# Altium PCB JPPCCCC.PCBDOC (part 1 of 2)
Units mm, origin at the board's own origin, x right, y up, seen from the top; angles counter-clockwise.
Board outline 108.84 x 93.85 mm, 2 copper layers (Top Layer, Bottom Layer); 131 components, 71 nets, 555 pads, 84 vias.
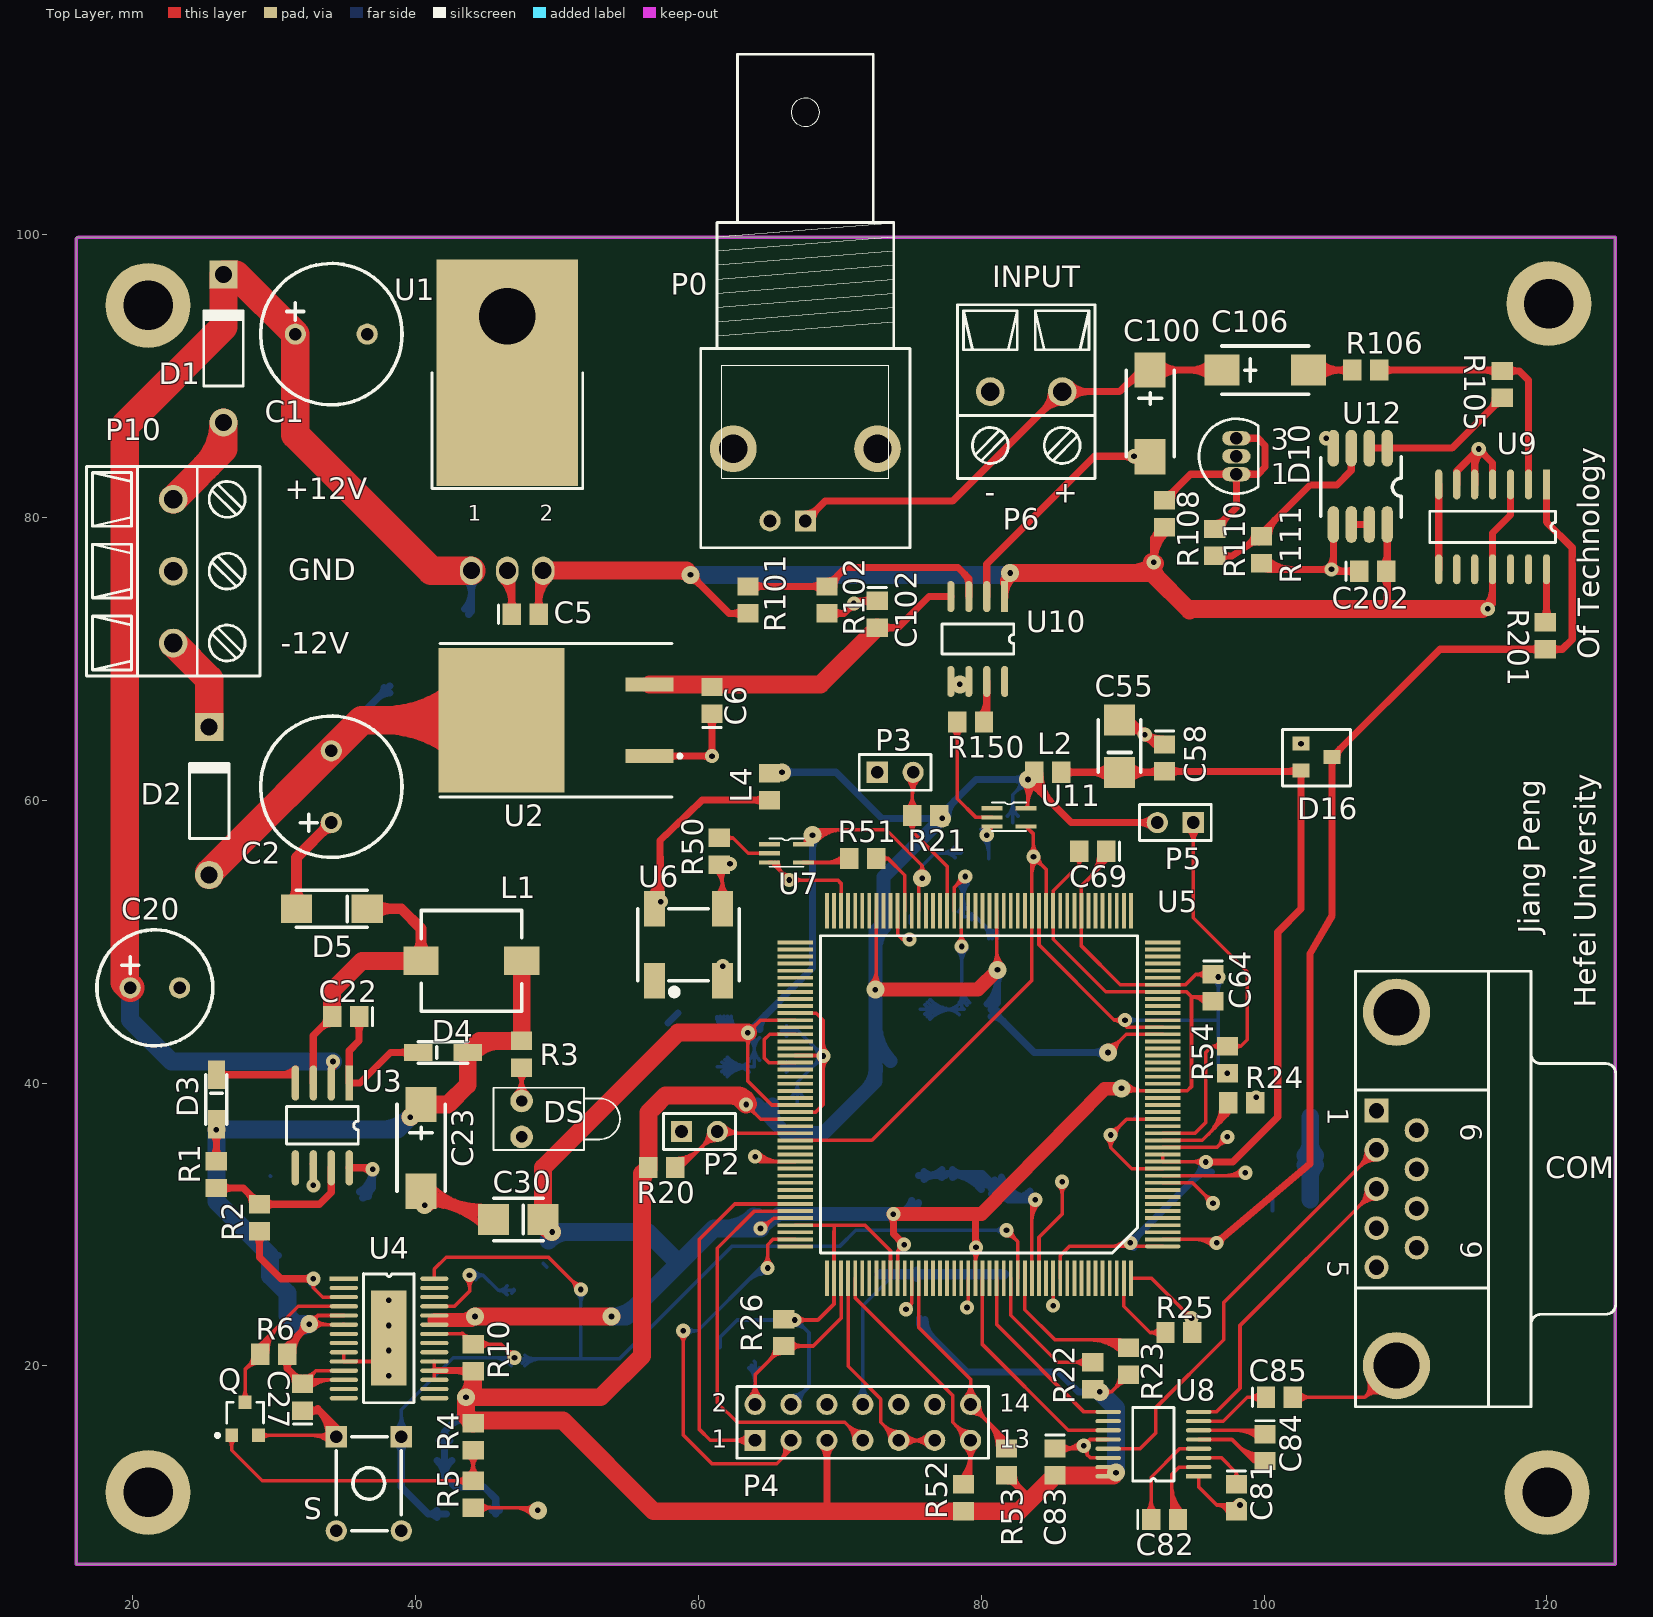
[diagram p0: Top Layer view]
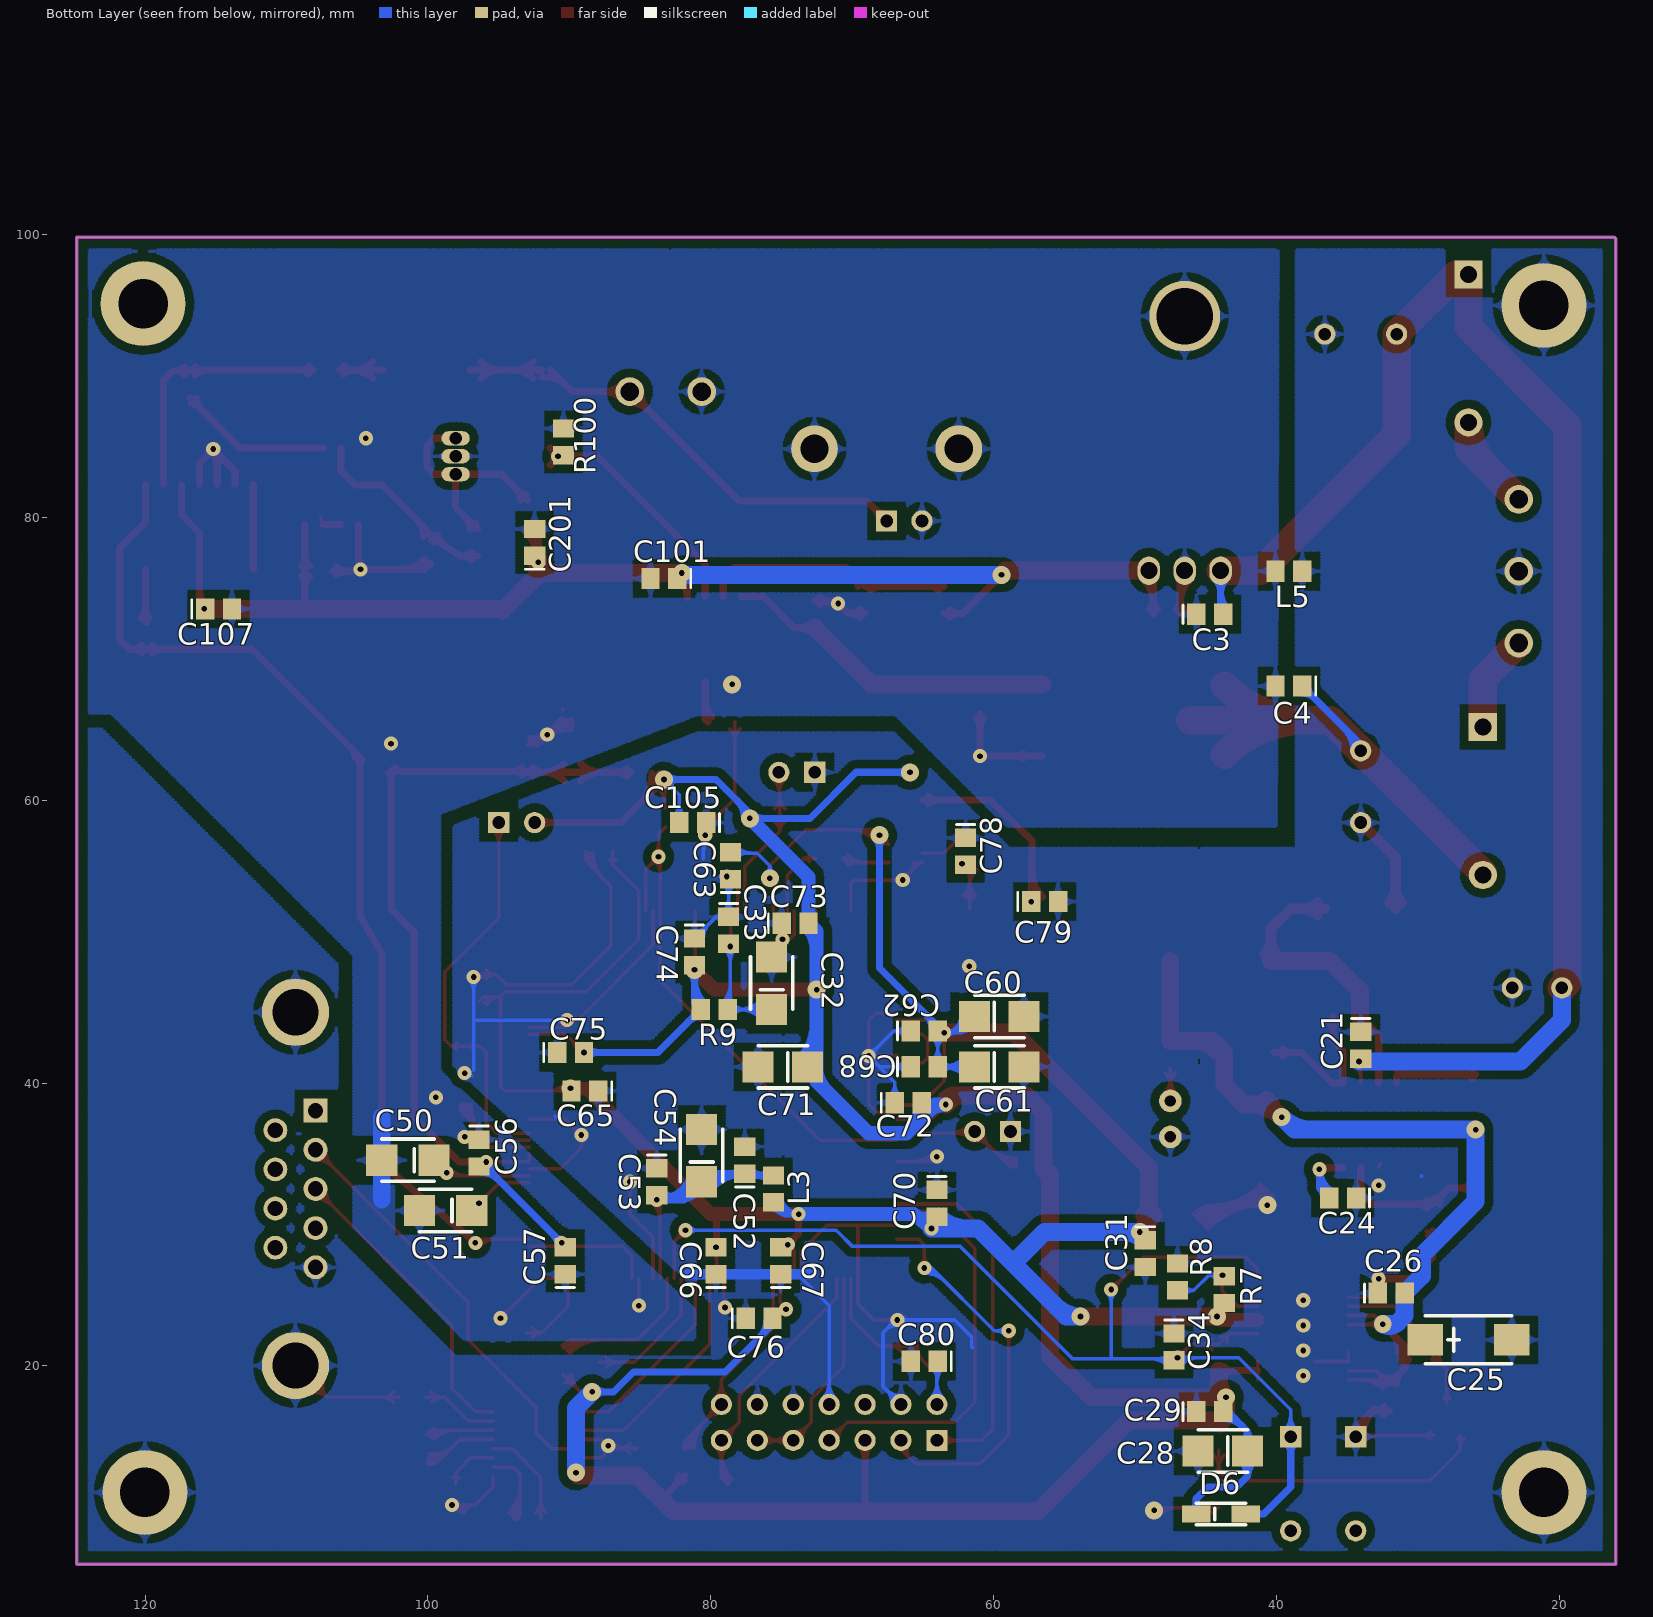
[diagram p1: Bottom Layer view, seen from below]

## Layer stack, top to bottom
Top Layer: signal copper 0.0356
Dielectric: core 0.32, FR-4, Dk 4.8
Bottom Layer: signal copper 0.0356

## Board outline
16.002,99.822 16.002,5.969 124.841,5.969 124.841,99.822

## Design rules (kind name [scope] priority, off if disabled: settings)
Clearance [All] p1: gap=0.23
ComponentClearance [All] p1: gap=0.254 collisioncheckmode=0
HoleSize [All] p1: absolutevalues=TRUE maxlimit=4 minlimit=0.025 maxpercent=80.000 minpercent=20.000
PolygonConnect [All] p1: connectstyle=Relief reliefconductorwidth=0.254 reliefentries=4 polygonreliefangle="90 Angle"
RoutingVias RoutingVias_1 [All] p1: holewidth=0.4 width=1 viastyle="Through Hole" minholewidth=0.4 minwidth=0.9 maxholewidth=0.4 maxwidth=1.27
RoutingVias [All] p2: holewidth=0.4 width=1 viastyle="Through Hole" minholewidth=0.4 minwidth=1 maxholewidth=0.4 maxwidth=1.27
ShortCircuit [All] p1 off: allowed=FALSE
SolderMaskExpansion [All] p1: expansion=0.102
TestPointUsage [All] p1: valid=0 allowmultiple=FALSE
Testpoint [All] p1: side=15 testpointundercomponent=TRUE minsize=1.016 maxsize=2.54 preferedsize=1.524 minholesize=0 maxholesize=1.016 preferedholesize=0.813 testpointgrid=0.025 style=1023 order=1234567890
Width [All] p1: maxlimit=2 minlimit=0.254 preferedwidth=0.254 bottomlayer_prefwidth=1.27 minimp=50.000000 maximp=50.000000 favimp=50.000000
15 further rules are at their usual default settings.

## Classes and differential pairs
component class Sheet1: C50 C51 C52 C53 C54 C55 C56 C57 C58 L2 L3 P2 P3 R20 R21 R22 R23 R24 R25 R26 U5
component class Sheet2: C1 C2 C3 C4 C5 C6 C20 C21 C22 C23 C24 C25 C26 C27 C28 C29 C30 C31 C32 C33 C34 D1 D2 D3 D4 D5 D6 DS L1 L5 P10 Q R1 R2 R3 R4 R5 R6 R7 R8 R9 R10 S U1 U2 U3 U4
component class Sheet3: C60 C61 C62 C63 C64 C65 C66 C67 C68 C69 C70 C71 C72 C73 C74 C75 C76 C78 C79 C80 C81 C82 C83 C84 C85 COM L4 P4 P5 R50 R51 R52 R53 R54 U6 U7 U8
component class Sheet4: C100 C101 C102 C105 C106 C107 C201 C202 D10 D16 P6 R100 R101 R102 R105 R106 R108 R110 R111 R150 R201 U9 U10 U11 U12

## Components (designator, comment, footprint, x,y, rotation, side; value= is the part's Value field where it differs from the comment)
C1 "470uF" C0915-0508 31.496,92.964 r0 top
C2 "470uF" C0915-0508 34.036,58.42 r90 top
C3 "0.1uF" CC2012-0805 44.704,73.152 r180 bottom
C4 "0.1uF" CC2012-0805 39.116,68.072 r0 bottom
C5 "0.1uF" CC2012-0805 47.752,73.152 r0 top
C6 "0.1uF" CC2012-0805 60.96,67.056 r90 top
C20 "100uF" C0915-0350 19.812,46.736 r0 top
C21 "0.1uF" CC2012-0805 34.036,42.672 r270 bottom
C22 "0.1uF" CC2012-0805 35.052,44.704 r180 top
C23 "47uF" CA2522-0612 40.386,38.481 r270 top
C24 "0.1uF" CC2012-0805 35.306,31.877 r0 bottom
C25 "47uF" CA2522-0612 29.464,21.844 r180 bottom
C26 "0.1uF" CC2012-0805 31.877,25.146 r180 bottom
C27 "0.1uF" CC2012-0805 32.004,17.78 r90 top
C28 "22uF" CA2222-0350 42.037,13.97 r0 bottom
C29 "0.1uF" CC2012-0805 44.704,16.764 r180 bottom
C30 "22uF" CA2222-0350 49.022,30.353 r180 top
C31 "0.1uF" CC2012-0805 49.276,27.94 r270 bottom
C32 "10uF" CA2222-0370 75.692,45.212 r90 bottom
C33 "0.1uF" CC2012-0805 78.74,50.8 r270 bottom
C34 "0.1uF" CC2012-0805 47.244,21.336 r270 bottom
C50 "10uF" CA2222-0370 99.568,34.544 r0 bottom
C51 "10uF" CA2222-0370 96.901,30.988 r0 bottom
C52 "0.001uF" CC2012-0805 77.597,34.544 r90 bottom
C53 "0.1uF" CC2012-0805 83.82,33.02 r270 bottom
C54 "10uF" CA2222-0370 80.645,33.02 r90 bottom
C55 "10uF" CA2222-0370 89.789,61.976 r90 top
C56 "0.1uF" CC2012-0805 96.393,35.052 r270 bottom
C57 "0.1uF" CC2012-0805 90.297,27.432 r90 bottom
C58 "0.001uF" CC2012-0805 92.964,62.992 r270 top
C60 "22uF" CA2222-0350 61.341,44.704 r180 bottom
C61 "22uF" CA2222-0350 61.341,41.148 r180 bottom
C62 "0.1uF" CC2012-0805 64.897,43.688 r180 bottom
C63 "0.1uF" CC2012-0805 78.613,55.372 r90 bottom
C64 "0.1uF" CC2012-0805 96.393,46.736 r270 top
C65 "0.1uF" CC2012-0805 88.9,39.448 r0 bottom
C66 "0.1uF" CC2012-0805 79.629,27.432 r90 bottom
C67 "0.1uF" CC2012-0805 75.057,27.432 r90 bottom
C68 "0.1uF" CC2012-0805 64.897,41.148 r180 bottom
C69 "0.1uF" CC2012-0805 87.884,56.388 r180 top
C70 "0.1uF" CC2012-0805 64.008,31.496 r270 bottom
C71 "22uF" CA2222-0350 73.152,41.148 r0 bottom
C72 "0.1uF" CC2012-0805 66.04,38.608 r180 bottom
C73 "0.1uF" CC2012-0805 74.041,51.308 r180 bottom
C74 "0.1uF" CC2012-0805 81.153,49.276 r270 bottom
C75 "0.1uF" CC2012-0805 89.916,42.164 r180 bottom
C76 "0.1uF" CC2012-0805 76.581,23.368 r180 bottom
C78 "33pF" CC2012-0805 61.976,56.388 r270 bottom
C79 "0.1uF" CC2012-0805 56.388,52.832 r180 bottom
C80 "0.1uF" CC2012-0805 64.897,20.32 r0 bottom
C81 "0.1uF" CC2012-0805 98.044,10.668 r270 top
C82 "0.1uF" CC2012-0805 92.964,9.144 r0 top
C83 "0.1uF" CC2012-0805 85.217,13.208 r270 top
C84 "0.1uF" CC2012-0805 100.076,14.224 r270 top
C85 "0.1uF" CC2012-0805 101.092,17.78 r0 top
C100 "47uF" CA2522-0612 91.948,90.424 r270 top
C101 "0.1uF" CC2012-0805 83.312,75.692 r0 bottom
C102 "0.1uF" CC2012-0805 72.644,73.152 r270 top
C105 "0.1uF" CC2012-0805 81.28,58.42 r0 bottom
C106 "47uF" CA2522-0612 97.028,90.424 r0 top
C107 "0.1uF" CC2012-0805 114.808,73.533 r180 bottom
C201 "0.1uF" CC2012-0805 92.456,78.232 r90 bottom
C202 "0.1uF" CC2012-0805 107.696,76.2 r0 top
COM "D Connector 9" DSUB1.385-2H9 118.872,32.512 r270 top
D1 "1N4007" DO-41 26.416,91.948 r90 top
D2 "1N4007" DO-41 25.4,59.944 r90 top
D3 "1N4148" D2012-0350 25.908,37.084 r90 top
D4 "1N4148" D2012-0350 43.688,42.164 r180 top
D5 "SS16" D2220-0500 36.576,52.324 r0 top
D6 "1N4148" D2012-0350 42.164,9.525 r0 bottom
D10 "TL431" BCY-W3 98.044,84.328 r0 top
D16 "BAT54S" SOT23 102.616,64.008 r270 top
DS "LED1" LED-1 47.498,37.465 r0 top
L1 "47uH" L2025-0712 40.386,48.641 r0 top
L2 "BLM21P221SN" CR2012-0805 84.709,61.976 r180 top
L3 "BLM21P221SN" CR2012-0805 75.565,32.512 r270 bottom
L4 "BLM21P221SN" CR2012-0805 65.024,60.96 r90 top
L5 "BLM21P221SN" CR2012-0805 39.116,76.2 r0 bottom
P0 "Comment" "BNC_RA CON" 67.564,79.756 r270 top
P2 "Header 2" HDR1X2 58.801,36.576 r0 top
P3 "Header 2" HDR1X2 72.644,61.976 r0 top
P4 "Header 7X2" HDR2X7 64.008,14.732 r0 top
P5 "Header 2" HDR1X2 94.996,58.42 r180 top
P6 "Header 2" 5.08_A 80.645,88.9 r0 top
P10 "Header 3" 5.08x3_A 22.86,71.12 r90 top
Q "BSS138" SO-G3/Z3.3 27.94,16.256 r0 top
R1 "220" CR2012-0805 25.908,33.528 r90 top
R2 "100" CR2012-0805 28.956,30.48 r90 top
R3 "1.1K" CR2012-0805 47.498,42.037 r90 top
R4 "1.5K" CR2012-0805 44.069,14.986 r90 top
R5 "2.0K" CR2012-0805 44.069,10.922 r90 top
R6 "10K" CR2012-0805 29.972,20.828 r0 top
R7 "16.9K" CR2012-0805 43.688,25.4 r270 bottom
R8 "30.1K" CR2012-0805 46.99,26.289 r90 bottom
R9 "0" CR2012-0805 79.756,45.212 r180 bottom
R10 "10K" CR2012-0805 44.069,20.574 r90 top
R20 "10K" CR2012-0805 57.404,34.036 r180 top
R21 "10k" CR2012-0805 76.073,58.928 r0 top
R22 "10K" CR2012-0805 87.884,19.304 r270 top
R23 "10K" CR2012-0805 90.424,20.32 r270 top
R24 "24.9K" CR2012-0805 98.425,38.608 r0 top
R25 "2.2K" CR2012-0805 93.98,22.352 r0 top
R26 "2.2K" CR2012-0805 66.04,22.352 r90 top
R50 "100" CR2012-0805 61.468,56.388 r90 top
R51 "100" CR2012-0805 71.628,55.88 r0 top
R52 "4.7K" CR2012-0805 78.74,10.668 r270 top
R53 "4.7K" CR2012-0805 81.788,13.208 r90 top
R54 "10K" CR2012-0805 97.409,41.656 r90 top
R100 "33K" CR2012-0805 90.424,85.344 r90 bottom
R101 "21K" CR2012-0805 63.5,74.168 r270 top
R102 "750" CR2012-0805 69.088,74.168 r90 top
R105 "2K" CR2012-0805 116.84,89.408 r90 top
R106 "2K" CR2012-0805 107.188,90.424 r0 top
R108 "1K" CR2012-0805 92.964,80.264 r270 top
R110 "1.1K" CR2012-0805 96.52,78.232 r90 top
R111 "1.5K" CR2012-0805 99.822,77.724 r90 top
R150 "100" CR2012-0805 79.248,65.532 r180 top
R201 "200" CR2012-0805 119.888,71.628 r270 top
S "Reset Button" SW0915-4666 38.989,14.986 r180 top
U1 "L7805CV" TO-220-H 1299.464,1343.787 r0 top
U2 "L7905CD2T" TO-263 51.308,65.659 r90 top
U3 "CS51414EDR8" AD8021ARZ-1 35.306,40.005 r270 top
U4 "TPS767D301" TPS767D301 34.925,26.162 r0 top
U5 "TMS320F2812" TMS320F2812PGFA 92.837,28.448 r180 top
U6 "30MHZ" CR1525-4850 56.896,47.244 r0 top
U7 "SN74LVC1G14" SC-70 65.024,56.896 r270 top
U8 "MAX3221E" PW16 95.377,12.192 r180 top
U9 "OPA2690I-14D" SOP14 119.976,82.335 r270 top
U10 "Comment" SOP8 81.661,74.403 r270 top
U11 "SN74LVC1G14" SC-70 80.772,59.436 r270 top
U12 "LM358" SO-8 108.712,84.902 r270 top

## Footprints (in the part's own frame and the unit in brackets; to place one, negate y for a bottom-side part, rotate by r counter-clockwise, add the part's x,y. Pads: shape width x height; smd on the part's side, far side on the other; paste and mask are expansions set on the pad)
5.08_A [mil]
  round 80 hole 52: 1(0,0) 2(200,0)
  silkscreen extent -92,-242 292,242
5.08x3_A [mil]
  round 80 hole 52: 1(0,0) 2(200,0) 3(400,0)
  silkscreen extent -92,-242 492,242
AD8021ARZ-1 [mm]
  rect 2.5x0.52 smd: 1(0,0)
  oval 2.5x0.52 smd: 2(0,-1.27) 3(0,-2.54) 4(0,-3.81) 5(6,-3.81) 6(6,-2.54) 7(6,-1.27) 8(6,0)
  silkscreen extent 1.65,-4.44 4.32,0.64
BCY-W3 [mm] "TO, Flat Index; 3 In-Line, Axial Leads; Body Dia. 4.8mm; Leads 0.55 x 0.51 mm (max)"
  oval 2x1 hole 0.9: 1(0,-1.27) 2(0,0) 3(0,1.27)
  silkscreen extent -2.65,-2.65 1.55,2.65
"BNC_RA CON" [mm] "Connector; BNC Elbow"
  rect 1.5x1.5 hole 0.9: 1(0,0)
  round 3.3 hole 2: 2(-5.1,5.1) 2(-5.1,-5.1)
  round 1.5 hole 0.9: 2(0,-2.5)
  silkscreen extent -33,-7.4 1.9,7.4
C0915-0350 [mm] "内径0.9mm，外径1.5mm，间距3.5mm"
  round 1.5 hole 0.9: 1(0,0) 2(3.5,0)
  silkscreen extent -2.35,-4.1 5.85,4.1
C0915-0508 [mm] "内径0.9mm，外径1.5mm，间距5.08mm"
  round 1.5 hole 0.9: 1(0,0) 2(5.08,0)
  silkscreen extent -2.46,-5 7.54,5
CA2222-0350 [mm] "焊盘2.2*2.2mm，间距3.50mm"
  rect 2.2x2.2 smd: 1(0,0) 2(3.5,0)
  silkscreen extent 0,-1.5 3.5,1.5
CA2222-0370 [mm] "焊盘2.2*2.2mm，间距3.70mm"
  rect 2.2x2.2 smd: 1(0,0) 2(3.7,0)
  silkscreen extent 0,-1.5 3.7,1.5
CA2522-0612 [mm] "焊盘2.5*2.2mm，间距6.12mm"
  rect 2.5x2.2 smd: 1(0,0) 2(6.12,0)
  silkscreen extent 0,-1.7 6.12,1.7
CC2012-0805 [mm] "Chip Capacitor; Body 2.0 x 1.2 mm (LxW typ)"
  rect 1.3x1.5 smd: 1(-0.95,0) 2(0.95,0)
  silkscreen extent -1.9,-0.65 -1.9,0.65
CR1525-4850 [mm] "焊盘：1.5*2.5mm，间距：4.8*5.08mm"
  rect 1.5x2.5 smd: 1(0,0) 4(4.8,0) 5(4.8,5.08) 8(0,5.08)
  silkscreen extent -1.2,-1 6,5.08
CR2012-0805 [mm] "Chip Resistor; Body 2.0 x 1.3 mm (LxW typ)"
  rect 1.3x1.5 smd: 1(-0.95,0) 2(0.95,0)
D2012-0350 [mm] "焊盘2.0*1.2mm，间距3.50mm"
  rect 2x1.2 smd: 1(0,0) 2(3.5,0)
  silkscreen extent 0,-0.75 3.5,0.75
D2220-0500 [mm] "焊盘2.2*2.0mm，间距5.00mm"
  rect 2.2x2 smd: 1(-5,0) 2(0,0)
  silkscreen extent -5,-1.3 0,1.3
DO-41 [mm] "Diode, Axial; Body 5.2 x 2.7 mm (LxDia. max), Lead Dia. 0.86 mm (max)"
  round 2 hole 1.2: 1(-5.23,0)
  rect 2x2 hole 1.2: 2(5.23,0)
  silkscreen extent -2.65,-1.41 2.75,1.4
DSUB1.385-2H9 [mm] "Connector; D Subminiature; 9 Position; Right Angle; Pitch 1.385 mm"
  rect 1.69x1.69 hole 1.09: 1(-5.54,-10.92)
  round 1.69 hole 1.09: 2(-2.77,-10.92) 3(0,-10.92) 4(2.77,-10.92) 5(5.54,-10.92) 6(-4.155,-8.08) 7(-1.385,-8.08) 8(1.385,-8.08) 9(4.155,-8.08)
  round 4.76 hole 3.26: 10(-12.495,-9.5) 11(12.495,-9.5)
  silkscreen extent -15.4,-12.4 15.4,6
HDR1X2 [mm] "Connector; Header; 2 Position"
  rect 1.5x1.5 hole 0.9: 1(0,0)
  round 1.5 hole 0.9: 2(2.54,0)
  silkscreen extent -1.27,-1.27 3.81,1.27
HDR2X7 [mm] "Connector; Header; 7x2 Position"
  rect 1.5x1.5 hole 0.9: 1(0,0)
  round 1.5 hole 0.9: 2(0,2.54) 3(2.54,0) 4(2.54,2.54) 5(5.08,0) 6(5.08,2.54) 7(7.62,0) 8(7.62,2.54) 9(10.16,0) 10(10.16,2.54) 11(12.7,0) 12(12.7,2.54) 13(15.24,0) 14(15.24,2.54)
  silkscreen extent -1.27,-1.27 16.51,3.81
L2025-0712 [mm] "2*2.5mm---7.12mm"
  rect 2.5x2 smd: 1(0,0) 2(7.12,0)
  silkscreen extent 0,-3.56 7.12,3.56
LED-1 [mm] "Typical RED GaAs LED; 2 Leads"
  round 1.6 hole 0.8: 1(0,1.27) 2(0,-1.27)
  silkscreen extent -2,-2.2 6.95,2.2
PW16 [mm] "焊盘0.30*1.80mm，间距0.65mm，列距6.40mm"
  rect 1.8x0.3 smd: 1(0,0)
  oval 1.8x0.3 smd: 2(0,-0.65) 3(0,-1.3) 4(0,-1.95) 5(0,-2.6) 6(0,-3.25) 7(0,-3.9) 8(0,-4.55) 9(6.4,-4.55) 10(6.4,-3.9) 11(6.4,-3.25) 12(6.4,-2.6) 13(6.4,-1.95) 14(6.4,-1.3) 15(6.4,-0.65) 16(6.4,0)
  silkscreen extent 1.73,-4.88 4.67,0.33
SC-70 [mm] "焊盘：0.3*1.5mm，间距0.65mm，2.40mm"
  rect 0.3x1.5 smd: 1(0,0) 2(0.65,0) 3(1.3,0) 4(1.3,2.4) 5(0,2.4)
  silkscreen extent -0.4,0 1.6,2.4
SO-8 [mm]
  oval 2.6x0.8 smd: 1(0,0) 2(0,-1.27) 3(0,-2.54) 4(0,-3.81) 5(5.4,-3.81) 6(5.4,-2.54) 7(5.4,-1.27) 8(5.4,0)
  silkscreen extent 0.6,-4.7 4.9,1
SO-G3/Z3.3 [mm] "SOT-23; 3 Leads; Body 3.0 x 2.5 mm, inc. leads (LxW max)"
  rect 0.9x0.95 smd: 1(-0.95,-1.175) 2(0.95,-1.175) 3(0,1.175)
  silkscreen extent -2.07,-1.3 1.3,1.18
SOP8 [mm]
  rect 2.2x0.5 smd: 1(0,0)
  oval 2.2x0.5 smd: 2(0,-1.27) 3(0,-2.54) 4(0,-3.81) 5(6,-3.81) 6(6,-2.54) 7(6,-1.27) 8(6,0)
  silkscreen extent 1.93,-4.44 4.07,0.64
SOP14 [mm]
  rect 2.12x0.508 smd: 1(0,0)
  oval 2.12x0.508 smd: 2(0,-1.27) 3(0,-2.54) 4(0,-3.81) 5(0,-5.08) 6(0,-6.35) 7(0,-7.62) 8(6,-7.62) 9(6,-6.35) 10(6,-5.08) 11(6,-3.81) 12(6,-2.54) 13(6,-1.27) 14(6,0)
  silkscreen extent 1.89,-8.25 4.1,0.64
SOT23 [mm]
  rect 1x1.2 smd: 1(0,0) 2(1.9,0) 3(0.95,2.2)
  silkscreen extent -1,-1.3 3,3.5
SW0915-4666 [mm] "焊盘：内径0.9mm，外径1.5mm，水平间距4.60mm，垂直间距6.65mm"
  rect 1.5x1.5 hole 0.9: 1(0,0) 2(4.6,0)
  round 1.5 hole 0.9: 3(4.6,6.65) 4(0,6.65)
  silkscreen extent 0,0 4.6,6.65
TMS320F2812PGFA [mm]
  oval 2.5x0.27 smd: 1(0,0)
  rect 2.5x0.27 smd: 2(0,-0.5) 3(0,-1) 4(0,-1.5) 5(0,-2) 6(0,-2.5) 7(0,-3) 8(0,-3.5) 9(0,-4) 10(0,-4.5) 11(0,-5) 12(0,-5.5) 13(0,-6) 14(0,-6.5) 15(0,-7) 16(0,-7.5) 17(0,-8) 18(0,-8.5) 19(0,-9) 20(0,-9.5) 21(0,-10) 22(0,-10.5) 23(0,-11) 24(0,-11.5) 25(0,-12) 26(0,-12.5) 27(0,-13) 28(0,-13.5) 29(0,-14) 30(0,-14.5) 31(0,-15) 32(0,-15.5) 33(0,-16) 34(0,-16.5) 35(0,-17) 36(0,-17.5) 37(0,-18) 38(0,-18.5) 39(0,-19) 40(0,-19.5) 41(0,-20) 42(0,-20.5) 43(0,-21) 44(0,-21.5) 89(26,-21.5) 90(26,-21) 91(26,-20.5) 92(26,-20) 93(26,-19.5) 94(26,-19) 95(26,-18.5) 96(26,-18) 97(26,-17.5) 98(26,-17) 99(26,-16.5) 100(26,-16) 101(26,-15.5) 102(26,-15) 103(26,-14.5) 104(26,-14) 105(26,-13.5) 106(26,-13) 107(26,-12.5) 108(26,-12) 109(26,-11.5) 110(26,-11) 111(26,-10.5) 112(26,-10) 113(26,-9.5) 114(26,-9) 115(26,-8.5) 116(26,-8) 117(26,-7.5) 118(26,-7) 119(26,-6.5) 120(26,-6) 121(26,-5.5) 122(26,-5) 123(26,-4.5) 124(26,-4) 125(26,-3.5) 126(26,-3) 127(26,-2.5) 128(26,-2) 129(26,-1.5) 130(26,-1) 131(26,-0.5) 132(26,0)
  rect 0.27x2.5 smd: 45(2.25,-23.75) 46(2.75,-23.75) 47(3.25,-23.75) 48(3.75,-23.75) 49(4.25,-23.75) 50(4.75,-23.75) 51(5.25,-23.75) 52(5.75,-23.75) 53(6.25,-23.75) 54(6.75,-23.75) 55(7.25,-23.75) 56(7.75,-23.75) 57(8.25,-23.75) 58(8.75,-23.75) 59(9.25,-23.75) 60(9.75,-23.75) 61(10.25,-23.75) 62(10.75,-23.75) 63(11.25,-23.75) 64(11.75,-23.75) 65(12.25,-23.75) 66(12.75,-23.75) 67(13.25,-23.75) 68(13.75,-23.75) 69(14.25,-23.75) 70(14.75,-23.75) 71(15.25,-23.75) 72(15.75,-23.75) 73(16.25,-23.75) 74(16.75,-23.75) 75(17.25,-23.75) 76(17.75,-23.75) 77(18.25,-23.75) 78(18.75,-23.75) 79(19.25,-23.75) 80(19.75,-23.75) 81(20.25,-23.75) 82(20.75,-23.75) 83(21.25,-23.75) 84(21.75,-23.75) 85(22.25,-23.75) 86(22.75,-23.75) 87(23.25,-23.75) 88(23.75,-23.75) 133(23.75,2.25) 134(23.25,2.25) 135(22.75,2.25) 136(22.25,2.25) 137(21.75,2.25) 138(21.25,2.25) 139(20.75,2.25) 140(20.25,2.25) 141(19.75,2.25) 142(19.25,2.25) 143(18.75,2.25) 144(18.25,2.25) 145(17.75,2.25) 146(17.25,2.25) 147(16.75,2.25) 148(16.25,2.25) 149(15.75,2.25) 150(15.25,2.25) 151(14.75,2.25) 152(14.25,2.25) 153(13.75,2.25) 154(13.25,2.25) 155(12.75,2.25) 156(12.25,2.25) 157(11.75,2.25) 158(11.25,2.25) 159(10.75,2.25) 160(10.25,2.25) 161(9.75,2.25) 162(9.25,2.25) 163(8.75,2.25) 164(8.25,2.25) 165(7.75,2.25) 166(7.25,2.25) 167(6.75,2.25) 168(6.25,2.25) 169(5.75,2.25) 170(5.25,2.25) 171(4.75,2.25) 172(4.25,2.25) 173(3.75,2.25) 174(3.25,2.25) 175(2.75,2.25) 176(2.25,2.25)
  silkscreen extent 1.79,-21.96 24.21,0.47
TO-220-H [mm]
  oval 1.6x2 hole 1.2: 1(-1255.522,-1267.553) 2(-1250.442,-1267.553) 3(-1252.982,-1267.553)
  rect 10x16 smd: 3(-1252.982,-1253.553)
  round 5 hole 4: 3(-1252.982,-1249.553)
  silkscreen extent -1258.32,-1261.74 -1247.65,-1253.55
TO-263 [mm] "D2-PAK/TO-263-AB; 3 Leads (1 Cropped); Body 15.9 (inc. leads) x 10.4 mm (LxW max)"
  rect 1x3.4 smd: 1(-2.54,-5.225) 3(2.54,-5.225)
  rect 10.25x8.9 smd: 4(0,5.225)
  silkscreen extent -5.43,-7.5 5.43,9.57
TPS767D301 [mm]
  rect 2x0.3 smd: 1(0,0)
  oval 2x0.3 smd: 2(0,-0.65) 3(0,-1.3) 4(0,-1.95) 5(0,-2.6) 6(0,-3.25) 7(0,-3.9) 8(0,-4.55) 9(0,-5.2) 10(0,-5.85) 11(0,-6.5) 12(0,-7.15) 13(0,-7.8) 14(0,-8.45) 15(6.4,-8.45) 16(6.4,-7.8) 17(6.4,-7.15) 18(6.4,-6.5) 19(6.4,-5.85) 20(6.4,-5.2) 21(6.4,-4.55) 22(6.4,-3.9) 23(6.4,-3.25) 24(6.4,-2.6) 25(6.4,-1.95) 26(6.4,-1.3) 27(6.4,-0.65) 28(6.4,0)
  silkscreen extent 1.4,-8.78 4.95,0.38

## Part data
C1 C2: library part "Cap Pol2", "Polarized Capacitor (Axial)"
C3 C4 C5 C6 C62 C63 C64 C65 C66 C67 C68 C69 C70 C72 C73 C74 C75 C79 C81 C82 C83 C84 C85 C201 C202: library part "Cap Semi", "Capacitor (Semiconductor SIM Model)"
C20 C23 C25 C28 C30: library part "Cap Pol1", "Polarized Capacitor (Radial)"
C21 C22 C24 C26 C27 C29 C31 C33 C34 C50 C51 C52 C53 C56 C57 C58 C76 C78 C80 C101 C102 C105 C107: library part Cap, "Capacitor"
C32 C54 C55 C60 C61 C71 C100 C106: library part "Cap Pol3", "Polarized Capacitor (Surface Mount)"
COM: "Receptacle Assembly, 9 Position, Right Angle"
D1 D2: "1.0 Ampere General Purpose Rectifier"
D3 D4 D6: library part "Diode 1N4148", "High Conductance Fast Diode"
D5: library part Diode, "Default Diode"
D16: "Schottky Barrier Double Diode"
DS: "Typical RED GaAs LED"
L1: library part Inductor, "Inductor"
L2 L3 L4 L5: library part "Inductor Iron", "Magnetic-Core Inductor"
P2 P3: library part "Header 2H", "Header, 2-Pin, Right Angle"
P4: "Header, 7-Pin, Dual row"
P5 P6: "Header, 2-Pin"
P10: "Header, 3-Pin"
R1 R2 R3 R4 R5 R6 R7 R8 R9 R10 R50 R51 R108 R111: library part Res1, "Resistor"
R20 R21 R22 R23 R24 R25 R26 R52 R53 R54 R100 R101 R102 R105 R106 R150: library part Res2, "Resistor"
R110: library part "Res Adj1", "Variable Resistor"
R201: library part Res3, "Resistor"
U1: "Positive Voltage Regulator"
U2: library part L7905CV, "Negative Voltage Regulator"
U3: library part CS51414
U5: library part TMS320F2812PGF
U6: library part Crystal, "有源晶振"
U9 U12: library part LF353

## Free pads (board coordinates)
  rect 2.5x6.7 smd: 0(38.1,21.971)
  round 2.032 hole 1.321: 1(22.86,71.12) 2(22.86,76.2) 3(22.86,81.28)
  round 6 hole 3.5: ""(21.082,11.049) ""(21.082,94.996) ""(120.015,11.049) ""(120.142,95.123)

## Via types
v1: diameter 1, hole 0.4, Top Layer to Bottom Layer, 61 vias
v2: diameter 1.27, hole 0.4, Top Layer to Bottom Layer, 23 vias

## Nets (pads, with @x,y where several pads share a name; then routed paths per layer and width w, separated by ;. In a path a pad name is that pad's centre, name@x,y a point inside that pad or via, vN(x,y) a via of type N, cw(c..) or ccw(c..) an arc to the next point about the centre after c; other vN are vias at no path point)
1.8V: C30.1 C31.1 C60.1 C61.1 C62.2 C63.2 C64.2 C65.2 C66.2 C67.2 C68.2 C69.2 C70.2 L3.2 R7.2 U4.23 U4.24 U5.23 U5.37 U5.56 U5.75 U5.100 U5.112 U5.128 U5.143 U5.154 U7.5 | length 267.5
  Top Layer w0.254: U4.23@41.325,22.912 U4.24@41.325,23.562 ; C30.1@49.022,29.852 C30.1@49.022,30.353 ; v1@63.236,43.297 cw(c62.6,42.661) 63.5,42.661 cw(c64.4,42.661) v1@63.764,43.297 ; v1@63.5,43.934 ccw(c63.5,44.834) 64.137,44.198 ccw(c64.773,43.561) v1@63.873,43.561 ; v1(64.389,29.718) 65.373,30.448 U5.128@66.837,30.448 ; v1@64.444,30.087 ccw(c64.576,30.978) 65.112,30.255 ccw(c65.649,29.531) v1@64.758,29.663 ; U5.112@66.837,38.448 65.184,38.448 63.5,40.132 v1(63.5,43.561) 64.387,44.448 U5.100@66.837,44.448 ; U7.5@67.424,56.896 U7.5@67.437,56.896 ; U7.5@67.539,56.884 cw(c67.799,56.89) 67.615,57.074 ; v2@67.579,57.408 cw(c67.055,57.278) U7.5@67.437,56.896 ; U7.5@67.793,56.89 cw(c68.616,56.911) v2@68.034,57.493 ; U7.5@67.949,57.038 ccw(c67.819,56.514) U7.5@67.437,56.896 ; U7.5@68.047,56.897 cw(c69.434,56.931) v2@68.453,57.912 ; v2(68.072,57.531) cw(c68.992,56.611) 68.992,57.912 ; v2@68.252,57.351 cw(c69.605,55.998) 69.605,57.912 ; v2@68.431,57.172 cw(c70.218,55.385) 70.218,57.912 ; U5.143@74.087,26.198 74.087,28.113 ; v1@74.188,28.482 cw(c73.814,28.386) 74.087,28.113 ; v1@74.456,28.214 ccw(c74.36,27.84) 74.087,28.113 ; v1(74.549,28.575) 74.087,28.113 ; v2@75.561,54.921 ccw(c75.295,55.372) 75.819,55.372 ; U5.75@75.587,52.198 v2@75.587,54.842 ; v2@75.587,54.825 v2@75.819,54.61 ; v2(75.819,54.483) 75.819,55.372 ; v2@76.077,54.921 cw(c76.343,55.372) 75.819,55.372 ; v1@79.365,28.118 cw(c78.83,27.583) 79.587,27.583 ; U5.154@79.587,26.198 v1@79.587,28.382 ; U5.154@79.587,27.38 cw(c80.631,27.38) v1@79.893,28.118 ; 79.587,30.692 79.629,30.734 ; C69.2@86.698,55.821 cw(c86.505,55.438) 86.934,55.438 ; C69.2@86.934,56.388 86.934,55.438 ; C69.2@87.17,55.821 ccw(c87.363,55.438) 86.934,55.438 ; v2(89.916,39.624) 90.092,39.448 94.566,39.448 94.869,39.751 94.869,46.101 ; v2@90.096,39.804 ccw(c90.954,40.662) 90.954,39.448 ; v2@90.275,39.265 cw(c90.717,38.823) 90.717,39.448 ; v2@90.275,39.983 ccw(c91.567,41.275) 91.567,39.448 ; 95.301,46.101 cw(c95.301,45.235) C64.2@96.058,45.655 ; C64.2@95.836,45.532 ccw(c94.869,44.995) 94.869,46.101 ; C64.2@96.393,45.786 96.078,46.101 94.869,46.101 ; U7.5@67.437,56.896 v2@68.453,57.912 ; v2@68.453,57.912 73.279,57.912 75.819,55.372 ; 86.934,55.438 85.087,53.591 85.087,50.168 88.807,46.448 U5.37@92.837,46.448 94.522,46.448 94.869,46.101
  Top Layer w0.5: v2(49.657,29.464) C30.1@49.784,29.464
  Top Layer w0.508: v1@73.613,30.56 cw(c73.193,30.14) 73.787,30.14 cw(c74.381,30.14) v1@73.961,30.56 ; v1(73.787,30.734) 73.787,29.337 v1(74.549,28.575) ; v1@74.303,28.575 ccw(c73.709,28.575) 74.129,28.995 ccw(c74.549,29.415) v1@74.549,28.821 ; 79.587,29.077 ccw(c80.324,29.077) v1@79.803,28.556 ; 79.587,30.692 79.587,28.424 v1(79.629,28.382)
  Top Layer w1: 41.325,23.241 43.942,23.241 v2(44.196,23.495) ; 43.257,23.241 ccw(c43.257,24.434) v2@44.101,23.59 ; v1(73.787,30.734) 80.01,30.734 88.724,39.575 v2(89.916,39.624)
  Top Layer w1.27: v2(44.196,23.495) v2(53.848,23.495) ; C30.1@48.693,30.682 ccw(c47.899,31.476) 49.022,31.476 ccw(c50.145,31.476) C30.1@49.351,30.682 ; C30.1@49.022,30.997 ccw(c51.19,30.997) v2(49.657,29.464) cw(c49.962,30.353) C30.1@49.022,30.353 49.022,34.036 58.547,43.561 v1(63.5,43.561)
  Bottom Layer w0.254: C60.1@61.298,44.703 ccw(c62.463,44.727) 62.463,43.561 ; C61.1@61.341,41.148 C68.2@63.947,41.148 C62.2@63.947,43.114 ; C60.1@61.341,44.704 62.484,43.561 ; C60.1@61.552,44.017 cw(c61.738,43.412) 62.186,43.859 cw(c62.633,44.307) C60.1@62.028,44.493 ; C60.1@61.552,44.708 ccw(c62.722,44.732) 62.722,43.561 ; C60.1@61.627,43.774 cw(c61.879,42.956) 62.484,43.561 ; C61.1@61.67,40.819 cw(c62.464,40.025) 62.464,41.148 cw(c62.464,42.271) C61.1@61.67,41.477 ; C60.1@61.806,44.713 ccw(c62.982,44.737) 62.982,43.561 ; C61.1@61.849,40.64 cw(c63.077,39.412) 63.077,41.148 cw(c63.077,42.884) C61.1@61.849,41.656 ; C61.1@62.029,40.46 cw(c63.69,38.799) 63.69,41.148 cw(c63.69,43.497) C61.1@62.029,41.836 ; C60.1@62.06,44.718 ccw(c63.241,44.742) v1@63.241,43.561 ; C60.1@62.271,44.418 ccw(c63.089,44.166) 62.484,43.561 ; C60.1@62.314,44.724 ccw(c63.5,44.747) v1(63.5,43.561) 62.484,43.561 ; 62.619,43.561 ccw(c62.619,44.916) C62.2@63.577,43.958 ; 62.75,43.561 cw(c62.75,42.391) 63.577,43.218 cw(c62.684,42.325) 63.947,42.325 cw(c65.21,42.325) C62.2@64.317,43.218 ; v1@63.232,43.561 ccw(c63.232,44.303) C62.2@63.757,43.778 ; v1@63.236,43.297 ccw(c62.6,42.661) 62.6,43.561 ccw(c62.6,44.461) v1@63.236,43.825 ; C68.2@63.577,40.778 ccw(c62.684,39.885) 62.684,41.148 ccw(c62.684,42.411) C68.2@63.577,41.518 ; C68.2@63.577,41.618 ccw(c62.684,42.511) 63.947,42.511 ccw(c65.21,42.511) C68.2@64.317,41.618 ; C62.2@63.82,43.561 C62.2@63.947,43.688 ; v2@75.561,54.921 ccw(c75.295,55.372) 75.819,55.372 ; v2@75.819,54.737 75.819,55.372 ; v2@76.077,54.921 cw(c76.343,55.372) 75.819,55.372 ; 77.103,56.261 ccw(c77.103,57.732) C63.2@78.143,56.692 ; 77.398,56.261 cw(c77.398,55.207) C63.2@78.143,55.952 ; 77.716,56.261 ccw(c77.716,57.119) C63.2@78.323,56.512 ; C63.2@78.613,56.322 78.552,56.261 76.708,56.261 75.819,55.372
  Bottom Layer w0.508: v1(63.5,43.561) 68.072,48.133 v2(68.072,57.531) ; C62.2@63.5,43.807 ccw(c63.5,44.401) 63.92,43.981 ccw(c64.34,43.561) C62.2@63.746,43.561 ; C62.2@64.343,43.788 cw(c65.83,43.788) 64.779,44.84 ; v2@67.803,57.262 cw(c67.152,56.611) 68.072,56.611 cw(c68.992,56.611) v2@68.341,57.262 ; v1@73.961,30.56 cw(c74.381,30.14) 74.381,30.734 cw(c74.381,31.328) v1@73.961,30.908 ; 74.483,30.734 ccw(c74.483,31.877) L3.2@75.572,31.528 ; 74.787,30.784 ccw(c74.099,31.472) L3.2@75.07,31.536 ; L3.2@74.96,30.957 cw(c75.465,30.451) L3.2@75.465,31.166 ; L3.2@75.088,31.683 cw(c73.787,32.1) v1(73.787,30.734) 74.737,30.734 L3.2@75.565,31.562 ; v2(75.819,54.483) v2@75.819,54.737
  Bottom Layer w1: C70.2@63.538,29.915 ccw(c64.086,30.521) v1@64.596,29.884 ; C70.2@64.209,30.657 ccw(c64.884,31.406) 65.515,30.618 ; v1(64.389,29.718) 64.561,29.855 65.659,30.734 v1(73.787,30.734)
  Bottom Layer w1.27: C31.1@49.387,28.879 cw(c50.798,27.468) 50.798,29.464 ; v2(49.657,29.464) 56.388,29.464 58.547,27.305 58.674,27.305 ; 55.582,24.213 cw(c53.848,25.948) v2(53.848,23.495) 54.864,23.495 61.087,29.718 v1(64.389,29.718) ; 61.873,29.718 ccw(c61.873,32.581) C70.2@63.897,30.557
3.3V: C28.1 C29.2 C71.1 C72.2 C73.2 C74.2 C75.2 C76.2 C83.2 C105.2 D6.2 L2.2 L4.2 P4.5 P5.2 R4.2 R9.1 R10.1 R20.2 R21.2 R22.2 R23.2 R52.2 R53.1 U4.17 U4.18 U4.19 U5.31 U5.64 U5.81 U5.114 U5.145 U8.15 U8.16 U11.5 | length 334.2
  Top Layer w0.254: U4.17@41.325,19.012 U4.19@41.325,20.312 ; v1@63.373,38.108 cw(c63.373,37.208) 64.01,37.844 cw(c64.646,38.481) v1@63.746,38.481 ; v1(63.373,38.481) 64.406,37.448 U5.114@66.837,37.448 ; v2@72.158,46.968 ccw(c71.121,48.005) 72.587,48.005 ; v2@72.337,46.789 ccw(c71.735,47.391) 72.587,47.391 ; v2(72.517,46.609) 72.587,46.679 U5.81@72.587,52.198 ; 72.587,47.666 ccw(c73.574,47.666) v2@72.876,46.968 ; v1(74.676,24.003) 75.087,24.414 ; v1@74.806,24.353 ccw(c74.899,24.602) 75.087,24.414 ; v1@75.026,24.133 cw(c75.275,24.226) 75.087,24.414 ; U5.145@75.087,26.198 75.087,24.414 ; R21.2@77.023,58.928 R21.2@77.501,58.451 ; v2@80.794,48.365 ccw(c80.086,49.073) 81.087,49.073 ; 81.087,48.779 ccw(c81.926,48.779) v2@81.333,48.186 ; 81.087,49.392 ccw(c82.539,49.392) v2@81.512,48.365 ; U5.64@81.087,52.198 81.087,48.072 v2(81.153,48.006) ; v2@82.953,61.109 cw(c82.159,60.315) 83.281,60.315 ; U11.5@83.156,59.452 ccw(c82.852,59.756) 83.281,59.756 ; U11.5@83.172,59.436 83.281,59.545 83.281,61.499 v2(83.312,61.468) ; U11.5@83.281,59.497 cw(c86.087,59.497) L2.2@84.125,61.502 ; 83.281,60.101 cw(c85.496,60.101) L2.2@83.947,61.684 ; 83.281,60.168 cw(c84.612,60.168) v2@83.671,61.109 ; 83.281,60.705 cw(c84.905,60.705) L2.2@83.769,61.865 ; 83.281,60.781 cw(c83.999,60.781) L2.2@83.492,61.288 ; L2.2@83.281,61.309 cw(c84.314,61.309) L2.2@83.592,62.047 ; R22.2@88.218,18.487 ccw(c88.778,18.806) v2@88.778,18.161 ; R22.2@88.354,17.984 cw(c88.781,17.557) v2@88.781,18.161 ; v2(88.392,18.161) 89.215,18.161 ; R22.2@88.439,18.613 ccw(c89.215,19.054) 89.215,18.161 ; v2@88.846,17.933 cw(c89.215,17.748) 89.215,18.161 ; v2@88.846,18.389 ccw(c89.215,18.574) 89.215,18.161 ; v2(88.966,42.164) 90.25,43.448 U5.31@92.837,43.448 ; v2@88.966,42.672 ccw(c88.966,43.898) 89.833,43.031 ccw(c90.7,42.164) v2@89.474,42.164 ; U8.16@88.977,12.192 U8.15@88.977,12.842 ; U8.16@88.977,12.258 89.347,12.258 v2(89.535,12.446) ; 89.36,18.306 ccw(c88.297,19.37) R23.2@89.801,19.37 ; 89.602,18.548 cw(c90.324,17.826) R23.2@90.324,18.847 ; R23.2@89.794,18.74 ccw(c89.164,19.37) R23.2@90.055,19.37 ; R23.2@90.424,19.37 89.215,18.161
  Top Layer w0.5: U4.18@41.325,19.662 R10.1@44.031,19.662 ; 42.912,19.662 cw(c42.912,18.567) R10.1@43.686,19.341 ; 43.095,19.662 ccw(c43.095,20.498) R10.1@43.686,19.907 ; 56.007,20.701 56.388,21.082
  Top Layer w0.508: P4.5@68.737,14.381 cw(c67.891,13.535) 69.088,13.535 cw(c70.285,13.535) P4.5@69.439,14.381 ; 69.088,9.718 P4.5@69.088,14.732 ; R53.1@81.788,12.258 81.791,12.258 83.504,10.545 ; R53.1@81.888,11.862 cw(c81.888,11.14) R53.1@82.399,11.651 ; R53.1@82.284,12.258 ccw(c83.474,12.258) 82.633,11.417 ; v2@83.312,61.087 cw(c83.312,60.167) 83.962,60.818 cw(c84.613,61.468) L2.2@83.693,61.468 ; v2(83.312,61.468) 86.36,58.42 P5.2@92.456,58.42 ; L2.2@83.647,61.876 ccw(c85.441,61.876) 84.172,60.608 ; L2.2@84.155,61.876 ccw(c87.175,61.876) 85.04,59.74 ; P5.2@92.105,58.069 ccw(c91.259,57.223) 91.259,58.42 ccw(c91.259,59.617) P5.2@92.105,58.771
  Top Layer w1: v2(72.517,46.609) 79.756,46.609 v2(81.153,48.006)
  Top Layer w1.27: 43.561,16.957 ccw(c44.99,16.957) R4.2@43.98,15.947 ; R4.2@43.942,16.129 50.419,16.129 56.83,9.718 82.677,9.718 C83.2@85.217,12.258 U8.16@89.347,12.258 ; R4.2@44.069,15.936 43.561,16.444 v2(43.561,17.78) ; R10.1@44.069,19.006 cw(c42.335,19.006) v2(43.561,17.78) ; R10.1@44.069,19.624 44.069,18.288 v2(43.561,17.78) ; 56.007,32.821 cw(c57.569,32.821) R20.2@56.465,33.925 ; 62.166,39.116 cw(c62.166,37.274) v1@63.468,38.576 ; v1(63.373,38.481) 62.738,39.116 ; v1@63.504,38.513 ccw(c62.738,38.328) 62.738,39.116 ; v2(43.561,17.78) 53.086,17.78 56.007,20.701 56.007,33.589 R20.2@56.454,34.036 56.454,37.907 56.896,38.349 56.896,38.354 57.658,39.116 62.738,39.116
  Bottom Layer w0.254: C72.2@64.963,38.481 C72.2@65.09,38.608 ; C74.2@80.965,47.818 v2(81.153,48.006) ; C105.2@81.86,58.89 ccw(c80.967,59.783) 82.23,59.783 ccw(c83.493,59.783) C105.2@82.6,58.89 ; C105.2@82.23,58.42 82.23,60.386 v2(83.312,61.468) ; v2@82.804,61.468 cw(c81.578,61.468) 82.445,60.601 cw(c83.312,59.734) v2@83.312,60.96
  Bottom Layer w0.5: C76.2@75.631,23.368 75.631,22.921 78.994,19.558 85.471,19.558 86.868,18.161 v2(88.392,18.161) ; C76.2@76.031,23.268 ccw(c77.834,23.268) 76.559,21.993 ; v2@88.12,17.889 ccw(c87.463,17.232) 87.463,18.161 ccw(c87.463,19.09) v2@88.12,18.433
  Bottom Layer w0.508: C28.1@41.503,13.314 cw(c40.592,12.192) 42.037,12.192 ; C28.1@41.645,14.72 ccw(c41.307,15.367) 42.037,15.367 ; 42.361,15.691 cw(c43.754,14.298) C29.2@43.754,16.268 ; C28.1@42.429,14.72 cw(c42.767,15.367) 42.037,15.367 ; C28.1@42.571,13.314 ccw(c43.482,12.192) 42.037,12.192 ; C29.2@43.754,16.764 43.434,16.764 42.037,15.367 ; D6.2@45.419,9.77 ccw(c44.829,10.36) 45.664,10.36 ccw(c46.499,10.36) D6.2@45.909,9.77 ; D6.2@45.664,9.525 45.664,10.597 44.831,11.43 42.799,11.43 42.037,12.192 ; v2(65.913,61.976) 69.723,61.976 72.98,58.719 v2(77.232,58.719) 77.232,59.071 79.629,61.468 v2(83.312,61.468) ; v2@66.182,61.707 cw(c66.833,61.056) 66.833,61.976 cw(c66.833,62.896) v2@66.182,62.245 ; v2@76.963,58.45 ccw(c76.312,57.799) 76.312,58.719 ccw(c76.312,59.639) v2@76.963,58.988 ; v2@77.613,58.719 cw(c79.383,58.719) 78.132,59.971 ; R9.1@80.426,45.592 ccw(c78.671,47.347) 81.153,47.347 ; R9.1@80.706,44.716 cw(c80.706,43.519) 81.553,44.365 ; R9.1@80.785,45.233 ccw(c79.897,46.121) 81.153,46.121 ; C74.2@80.873,48.046 cw(c80.197,47.37) 81.153,47.37 cw(c82.109,47.37) C74.2@81.433,48.046 ; C74.2@80.884,47.737 cw(c80.233,47.086) 81.153,47.086 cw(c82.073,47.086) C74.2@81.422,47.737 ; R9.1@81.102,45.112 ccw(c81.817,45.112) R9.1@81.311,44.607 ; v2(81.153,48.006) 81.153,45.659 R9.1@80.706,45.212 83.754,42.164 v2(88.966,42.164) ; v2@83.043,61.199 ccw(c82.392,60.548) 82.392,61.468 ccw(c82.392,62.388) v2@83.043,61.737 ; C75.2@88.686,41.884 ccw(c88.01,41.208) 88.01,42.164 ccw(c88.01,43.12) C75.2@88.686,42.444 ; C75.2@88.697,41.895 ccw(c88.046,41.244) 88.046,42.164 ccw(c88.046,43.084) C75.2@88.697,42.433 ; 42.037,12.192 C28.1@42.037,13.97 42.037,15.367
  Bottom Layer w1: C72.2@64.516,38.1 ccw(c63.564,37.148) v1(63.373,38.481) ; C72.2@64.674,37.942 ccw(c63.373,36.641) v1(63.373,38.481) ; C72.2@65.236,38.474 ccw(c66.84,38.104) 65.676,36.94 ; 71.858,39.473 ccw(c70.184,41.148) C71.1@72.552,41.148 ; 72.517,44.13 ccw(c76.134,44.13) C71.1@73.576,41.572 ; 72.517,49.46 cw(c74.839,49.46) C73.2@73.197,51.102 ; v2(77.232,58.719) 73.091,54.578 C73.2@73.091,51.308 72.517,50.734 72.517,40.132 68.834,36.449 66.167,36.449 64.135,38.481 v1(63.373,38.481)
  Bottom Layer w1.27: v2(88.392,18.161) 89.535,17.018 v2(89.535,12.446)
A1: D16.3 R201.2 U5.2 U9.1 | length 81.7
  Top Layer w0.254: U5.2@92.837,28.948 96.401,28.948 v1(96.647,28.702) ; 95.153,28.948 cw(c95.153,27.208) v1@96.383,28.438 ; 95.766,28.948 cw(c95.766,27.821) v1@96.563,28.618
  Top Layer w0.508: v1(96.647,28.702) 103.251,34.29 103.251,49.149 104.816,51.857 D16.3@104.816,63.058 112.436,70.678 121.097,70.678 121.793,71.374 121.793,77.851 119.976,79.668 U9.1@119.976,82.335 ; v1@96.667,28.947 ccw(c96.717,29.539) 97.1,29.086 ccw(c97.484,28.632) v1@96.892,28.682 ; D16.3@104.642,62.884 cw(c104.222,62.464) 104.816,62.464 cw(c105.41,62.464) D16.3@104.99,62.884 ; D16.3@105.162,63.058 cw(c105.997,63.058) 105.407,63.649 ; R201.2@119.508,70.398 ccw(c118.832,69.722) 118.832,70.678 ccw(c118.832,71.634) R201.2@119.508,70.958 ; R201.2@120.268,70.398 cw(c120.944,69.722) 120.944,70.678 cw(c120.944,71.634) R201.2@120.268,70.958
ADCD1.8: C52.1 C53.2 C54.1 L3.1 U5.162 | length 39.9
  Top Layer w0.254: U5.162@83.587,26.198 83.587,31.517 v1(83.82,31.75) ; 83.587,30.287 cw(c85.283,30.287) v1@84.084,31.486 ; 83.587,30.9 cw(c84.67,30.9) v1@83.904,31.666
  Bottom Layer w0.254: C54.1@80.645,33.02 C54.1@81.28,33.02
  Bottom Layer w0.508: L3.1@75.565,33.462 77.465,33.462 C52.1@77.597,33.594 ; L3.1@75.945,33.182 cw(c76.621,32.506) 76.621,33.462 cw(c76.621,34.418) L3.1@75.945,33.742 ; L3.1@76.222,33.462 ccw(c76.222,34.869) C52.1@77.217,33.874 ; C52.1@76.86,33.462 cw(c76.86,32.957) C52.1@77.217,33.314 ; C52.1@77.977,33.314 cw(c78.653,32.638) 78.653,33.594 cw(c78.653,34.55) C52.1@77.977,33.874 ; 78.687,33.594 cw(c78.687,31.375) C54.1@80.386,32.803 ; C54.1@79.997,32.476 ccw(c77.597,30.459) C52.1@77.597,33.594 ; C54.1@80.488,32.955 ccw(c82.295,33.708) 82.295,31.75 ; C54.1@80.725,32.178 cw(c80.866,30.701) 81.915,31.75 ; C54.1@80.957,33.15 ccw(c83.058,34.026) 83.058,31.75 ; C54.1@81.426,33.346 ccw(c83.82,34.344) v1(83.82,31.75) 81.915,31.75 ; C54.1@81.487,32.94 ccw(c82.964,32.799) 81.915,31.75 ; 81.991,31.75 ccw(c81.991,33.799) C53.2@83.44,32.35 ; C53.2@83.646,31.576 ccw(c83.226,31.156) 83.226,31.75 ccw(c83.226,32.344) C53.2@83.646,31.924 ; C52.1@77.597,33.594 80.071,33.594 81.915,31.75
ADCLOPD: R25.1 U5.175 | length 7.2
  Top Layer w0.254: U5.175@90.087,26.198 90.087,24.213 91.948,22.352 ; R25.1@92.62,22.027 ccw(c91.948,21.494) 91.948,22.352 ; R25.1@92.62,22.677 cw(c91.948,23.21) 91.948,22.352 ; R25.1@93.03,22.352 91.948,22.352
ADCREFM: C51.1 U5.10 | length 5.6
  Top Layer w0.254: U5.10@92.837,32.948 94.941,32.948 v1(96.393,31.496) ; v1@96.02,31.496 ccw(c95.12,31.496) 95.756,32.133 ccw(c96.393,32.769) v1@96.393,31.869
ADCREFP: C50.1 U5.11 | length 8
  Top Layer w0.254: U5.11@92.837,33.448 98.472,33.448 v1(98.679,33.655) ; 97.279,33.448 ccw(c97.279,35.055) v1@98.415,33.919 ; 97.892,33.448 ccw(c97.892,34.442) v1@98.595,33.739
ADCRESEXT: R24.1 U5.16 | length 13.4
  Top Layer w0.254: U5.16@92.837,35.948 95.638,35.948 97.475,37.785 ; 96.071,36.381 ccw(c93.944,38.508) R24.1@96.952,38.508 ; 96.505,36.815 ccw(c94.811,38.508) R24.1@97.206,38.508 ; 96.938,37.248 ccw(c95.678,38.508) R24.1@97.46,38.508 ; R24.1@97.311,38.011 cw(c97.237,37.785) 97.475,37.785 ; 97.372,37.682 ccw(c96.545,38.508) R24.1@97.714,38.508 ; R24.1@97.475,38.608 97.475,37.785 ; R24.1@97.639,38.011 ccw(c97.713,37.785) 97.475,37.785
ADIOA3.3: C55.1 C56.2 C57.2 C58.2 D16.2 L2.1 U5.1 U5.13 U5.14 U5.166 | length 91.3
  Top Layer w0.254: U5.166@85.587,26.198 85.587,27.802 86.233,28.448 U5.1@92.837,28.448 ; 89.037,28.448 ccw(c89.037,30.216) v1@90.287,28.966 ; 89.651,28.448 ccw(c89.651,29.602) v1@90.467,28.786 ; C58.2@92.71,61.976 C58.2@92.898,61.976 ; U5.14@92.837,34.948 U5.13@92.837,34.448 v1@95.854,34.448 ; 94.91,34.448 cw(c94.91,33.442) v1@95.621,34.153 ; 95.059,34.448 ccw(c95.059,35.243) v1@95.621,34.681
  Top Layer w0.508: L2.1@85.659,61.976 C58.2@92.71,61.976 ; L2.1@85.939,61.696 cw(c86.615,61.02) 86.615,61.976 cw(c86.615,62.932) L2.1@85.939,62.256 ; C55.1@89.191,61.378 ccw(c87.747,59.934) 87.747,61.976 ccw(c87.747,64.018) C55.1@89.191,62.574 ; C55.1@90.387,61.378 cw(c91.831,59.934) 91.831,61.976 cw(c91.831,64.018) C55.1@90.387,62.574 ; 91.749,61.976 ccw(c91.749,63.157) C58.2@92.584,62.322 ; 92.067,61.976 cw(c92.067,61.245) C58.2@92.584,61.762 ; C58.2@92.898,61.976 C58.2@92.964,62.042 102.55,62.042 D16.2@102.616,62.108 102.616,52.324 100.965,50.673 100.965,37.592 97.79,34.417 v1(95.885,34.417) ; C58.2@93.344,61.762 cw(c94.02,61.086) 94.02,62.042 cw(c94.02,62.998) C58.2@93.344,62.322 ; v1@96.059,34.243 cw(c96.479,33.823) 96.479,34.417 cw(c96.479,35.011) v1@96.059,34.591 ; 101.763,62.042 ccw(c101.763,62.861) D16.2@102.342,62.282 ; D16.2@102.442,61.934 cw(c102.022,61.514) 102.616,61.514 cw(c103.21,61.514) D16.2@102.79,61.934
  Bottom Layer w0.508: C57.2@90.397,28.778 ccw(c90.397,29.333) C57.2@90.79,28.941 ; v1(90.551,28.702) 95.885,34.036 v1(95.885,34.417) ; C57.2@90.551,28.948 ccw(c90.551,29.542) 90.971,29.122 ccw(c91.391,28.702) C57.2@90.797,28.702 ; C57.2@90.793,28.382 cw(c92.15,28.382) 91.19,29.341 ; 95.033,33.184 cw(c96.293,31.924) C56.2@96.293,33.706 ; 95.196,33.347 ccw(c94.125,34.417) v1@95.639,34.417
AGND: C3.1 C4.2 C5.1 C6.1 C50.2 C51.2 C55.2 C56.1 C57.1 C58.1 C101.2 C102.1 C107.2 C201.2 C202.1 D10.2 D16.1 L5.2 P0.2 P6.1 R24.2 R25.2 R100.2 R102.1 R111.1 U1.3 U2.1 U5.15 U5.165 U5.176 U9.4 U9.5 U9.6 U10.5 U10.6 U12.4 U12.5 | length 109
  Top Layer w0.254: U1.3@46.482,76.234 U1.3@46.802,75.914 ; v1(85.087,24.257) U5.165@85.087,26.198 ; C55.2@89.788,65.719 cw(c89.825,64.113) 90.961,65.249 ; C55.2@89.789,65.676 90.534,65.676 92.268,63.942 C58.1@92.964,63.942 ; C55.2@89.794,65.465 cw(c89.844,63.292) v1@91.381,64.829 ; C55.2@89.8,65.211 cw(c89.863,62.472) v1@91.801,64.409 ; C55.2@89.806,64.957 cw(c89.882,61.651) C58.1@92.221,63.989 ; C55.2@90.424,66.421 C55.2@90.485,66.421 ; U5.176@90.587,26.198 92.039,26.198 v1(94.869,23.368) ; C55.2@90.762,65.676 ccw(c91.312,65.676) 90.923,65.287 ; 90.954,65.256 ccw(c92.864,67.167) C58.1@92.864,64.465 ; v1@91.194,64.643 ccw(c90.294,64.643) 90.93,65.28 ccw(c91.567,65.916) v1@91.567,65.016 ; v1@91.387,64.823 ccw(c92.864,66.299) C58.1@92.864,64.211 ; v1@91.567,64.27 cw(c91.567,63.37) 92.204,64.006 cw(c92.84,64.643) v1@91.94,64.643 ; v1@91.821,64.389 ccw(c92.864,65.432) C58.1@92.864,63.957 ; U5.15@92.837,35.448 96.662,35.448 v1(97.409,36.195) ; v1@94.496,23.368 ccw(c93.596,23.368) 94.232,24.005 ccw(c94.869,24.641) v1@94.869,23.741 ; v1@97.036,36.195 cw(c96.136,36.195) 96.772,35.558 cw(c97.409,34.922) v1@97.409,35.822
  Top Layer w0.508: U1.3@46.096,75.648 cw(c44.391,73.943) 46.802,73.943 ; U1.3@46.455,76.007 cw(c45.618,75.17) 46.802,75.17 ; C5.1@46.522,73.532 ccw(c45.846,74.208) 46.802,74.208 ; C5.1@46.802,73.152 U1.3@46.802,75.914 ; 46.802,74.208 ccw(c47.758,74.208) C5.1@47.082,73.532 ; U2.1@56.533,63.119 v1(60.96,63.119) C6.1@60.96,66.106 ; U2.1@57.907,62.945 cw(c58.327,62.525) 58.327,63.119 cw(c58.327,63.713) U2.1@57.907,63.293 ; C6.1@60.68,65.826 cw(c60.004,65.15) 60.96,65.15 cw(c61.916,65.15) C6.1@61.24,65.826 ; v1@60.786,62.945 ccw(c60.366,62.525) 60.366,63.119 ccw(c60.366,63.713) 60.786,63.293 ccw(c60.366,63.713) 60.96,63.713 ccw(c61.554,63.713) v1@61.134,63.293 ; R102.1@69.088,73.218 70.297,73.218 71.181,74.102 C102.1@72.644,74.102 ; R102.1@69.468,72.938 cw(c70.144,72.262) 70.144,73.218 cw(c70.144,74.174) R102.1@69.468,73.498 ; v1@70.747,73.914 cw(c70.153,73.914) 70.573,73.494 cw(c70.993,73.074) v1@70.993,73.668 ; v1@71.167,73.74 cw(c72.041,72.866) C102.1@72.041,74.102 ; C102.1@72.264,73.822 ccw(c71.588,73.146) 71.588,74.102 ccw(c71.588,75.058) C102.1@72.264,74.382 ; C55.2@89.861,65.346 cw(c90.189,63.836) v1@91.281,64.929 ; C55.2@90.534,65.676 v1(91.567,64.643) C58.1@92.268,63.942 ; v1@91.321,64.643 ccw(c90.727,64.643) 91.147,65.063 ccw(c91.567,65.483) v1@91.567,64.889 ; v1@91.567,64.397 cw(c91.567,63.803) 91.987,64.223 cw(c92.407,64.643) v1@91.813,64.643 ; v1@91.865,64.345 ccw(c92.299,64.779) C58.1@92.642,64.27 ; R111.1@99.822,76.774 100.269,76.327 v1(104.775,76.327) ; R111.1@99.843,76.695 ccw(c100.731,77.583) 100.731,76.327 ; R111.1@100.202,77.054 ccw(c101.957,78.809) 101.957,76.327 ; v1@104.601,76.153 ccw(c104.181,75.733) 104.181,76.327 ccw(c104.181,76.921) 104.601,76.501 ccw(c103.875,77.227) 104.902,77.227 ; U12.5@104.902,79.502 104.902,76.454 v1(104.775,76.327) ; v1@104.949,76.501 ccw(c105.675,77.227) 105.675,76.2 ; C202.1@106.466,75.92 ccw(c105.79,75.244) 105.79,76.2 ccw(c105.79,77.156) C202.1@106.466,76.48 ; C202.1@106.746,76.2 104.902,76.2 v1(104.775,76.327) ; U9.6@113.626,82.335 113.626,83.273 v1(115.189,84.836) 116.166,83.859 U9.4@116.166,82.335 ; U9.5@114.896,82.335 v1@114.896,84.543 ; 114.896,83.535 cw(c116.49,83.535) v1@115.363,84.662 ; v1@114.943,84.836 cw(c114.349,84.836) 114.769,84.416 cw(c115.189,83.996) 115.189,84.59 cw(c115.189,83.996) 115.609,84.416 cw(c116.029,84.836) v1@115.435,84.836
  Bottom Layer w0.254: C51.2@100.601,30.988 C51.2@100.601,31.877
  Bottom Layer w1.27: C50.2@102.939,34.215 cw(c102.145,33.421) 103.268,33.421 cw(c104.391,33.421) C50.2@103.597,34.215 ; C50.2@102.939,34.873 ccw(c102.145,35.667) 103.268,35.667 ccw(c104.391,35.667) C50.2@103.597,34.873 ; 103.268,31.767 103.268,37.609
  other v1: 99.441,38.989 102.616,64.008 70.993,73.914 104.394,85.598
  other v2: 78.486,68.199
AVDD1.5: R105.1 U12.1 U12.2 | length 12.4
  Top Layer w0.508: U12.2@107.442,84.902 113.284,84.902 R105.1@116.84,88.458 ; 115.993,87.611 ccw(c115.147,88.458) R105.1@116.344,88.458 ; R105.1@116.235,87.853 cw(c116.74,87.347) R105.1@116.74,88.062
AVDD5: C5.2 C101.1 C107.1 C201.1 C202.2 R101.2 R108.2 U1.2 U9.3 U9.11 U10.1 U12.8 | length 121.4
  Top Layer w0.254: U1.2@48.702,75.914 U1.2@49.022,76.234 ; U12.8@108.646,79.436 U12.8@108.712,79.502
  Top Layer w0.5: U9.11@116.166,76.581 116.166,78.906 117.436,80.176
  Top Layer w0.508: C5.2@48.422,73.532 ccw(c47.746,74.208) 48.702,74.208 ; C5.2@48.702,73.152 U1.2@48.702,75.914 ; 48.702,73.943 cw(c51.113,73.943) U1.2@49.408,75.648 ; 48.702,74.208 ccw(c49.658,74.208) C5.2@48.982,73.532 ; 48.702,75.17 cw(c49.886,75.17) U1.2@49.049,76.007 ; v2@59.436,75.565 cw(c59.436,74.645) 60.086,75.296 cw(c60.737,75.946) v2@59.817,75.946 ; v2(59.436,75.946) 62.164,73.218 R101.2@63.5,73.218 ; R101.2@63.12,72.938 ccw(c62.444,72.262) 62.444,73.218 ccw(c62.444,74.174) R101.2@63.12,73.498 ; U10.1@81.657,75.253 cw(c82.707,75.253) v2@81.965,75.996 ; U10.1@81.658,75.25 cw(c81.883,75.47) v2@81.661,75.692 ; U10.1@81.661,74.36 cw(c83.586,74.36) v2@82.297,75.79 ; U10.1@81.661,74.403 v2@81.661,75.692 ; U10.1@81.661,75.502 cw(c82.557,75.502) v2@81.957,76.167 ; v2(82.042,76.073) v2@81.661,75.692 ; v1@92.028,77.009 ccw(c91.608,77.429) 92.202,77.429 ccw(c92.796,77.429) v1@92.376,77.009 ; v1@92.202,76.76 cw(c95.418,76.76) R108.2@93.144,79.034 ; v1(92.202,76.835) 92.202,78.552 R108.2@92.964,79.314 ; 92.202,77.986 cw(c94.192,77.986) R108.2@92.785,79.393 ; 92.252,78.602 ccw(c91.703,79.151) R108.2@92.472,79.259 ; R108.2@92.359,78.709 cw(c92.864,78.203) R108.2@92.864,78.918 ; C202.2@108.366,75.82 cw(c107.531,74.985) 108.712,74.985 ; C202.2@108.366,76.58 ccw(c107.531,77.415) 108.712,77.415 ; 108.712,73.533 U12.8@108.712,79.502 ; 108.712,75.303 cw(c109.443,75.303) C202.2@108.926,75.82 ; 108.712,77.097 ccw(c109.443,77.097) C202.2@108.926,76.58 ; v1@115.65,73.707 ccw(c114.404,74.953) 116.166,74.953 ; v1(115.824,73.533) 116.166,73.875 U9.11@116.166,76.335 ; 117.436,80.176 U9.3@117.436,82.335
  Top Layer w1.27: U1.2@49.022,76.234 59.148,76.234 v2(59.436,75.946) ccw(c58.741,75.251) 58.741,76.234 ; v2(82.042,76.073) 92.075,76.073 94.742,73.406 ; 90.688,76.073 ccw(c90.688,78.349) v1@92.297,76.74 ; v1@92.067,76.835 ccw(c93.887,76.835) 92.6,75.548 ; 94.991,73.533 v1@115.443,73.533
  Bottom Layer w1.27: v2(59.436,75.946) 81.915,75.946 v2(82.042,76.073)
AVDD5N: C6.2 C102.2 U2.3 U10.4 | length 25.4
  Top Layer w0.508: C102.2@72.644,72.202 74.107,72.202 76.308,74.403 U10.4@77.851,74.403 ; C102.2@73.024,71.922 cw(c73.7,71.246) 73.7,72.202 cw(c73.7,73.158) C102.2@73.024,72.482
  Top Layer w1.27: U2.3@56.533,68.199 68.641,68.199 C102.2@72.644,72.202